# Altium PCB Measurement_board.PcbDoc
Units mil, origin at the board's own origin, x right, y up, seen from the top; angles counter-clockwise.
Board outline 2845 x 3910.04 mil, 2 copper layers (Top Layer, Bottom Layer); 135 components, 113 nets, 406 pads, 74 vias.
Unrouted connection lines stored in the file: 2.
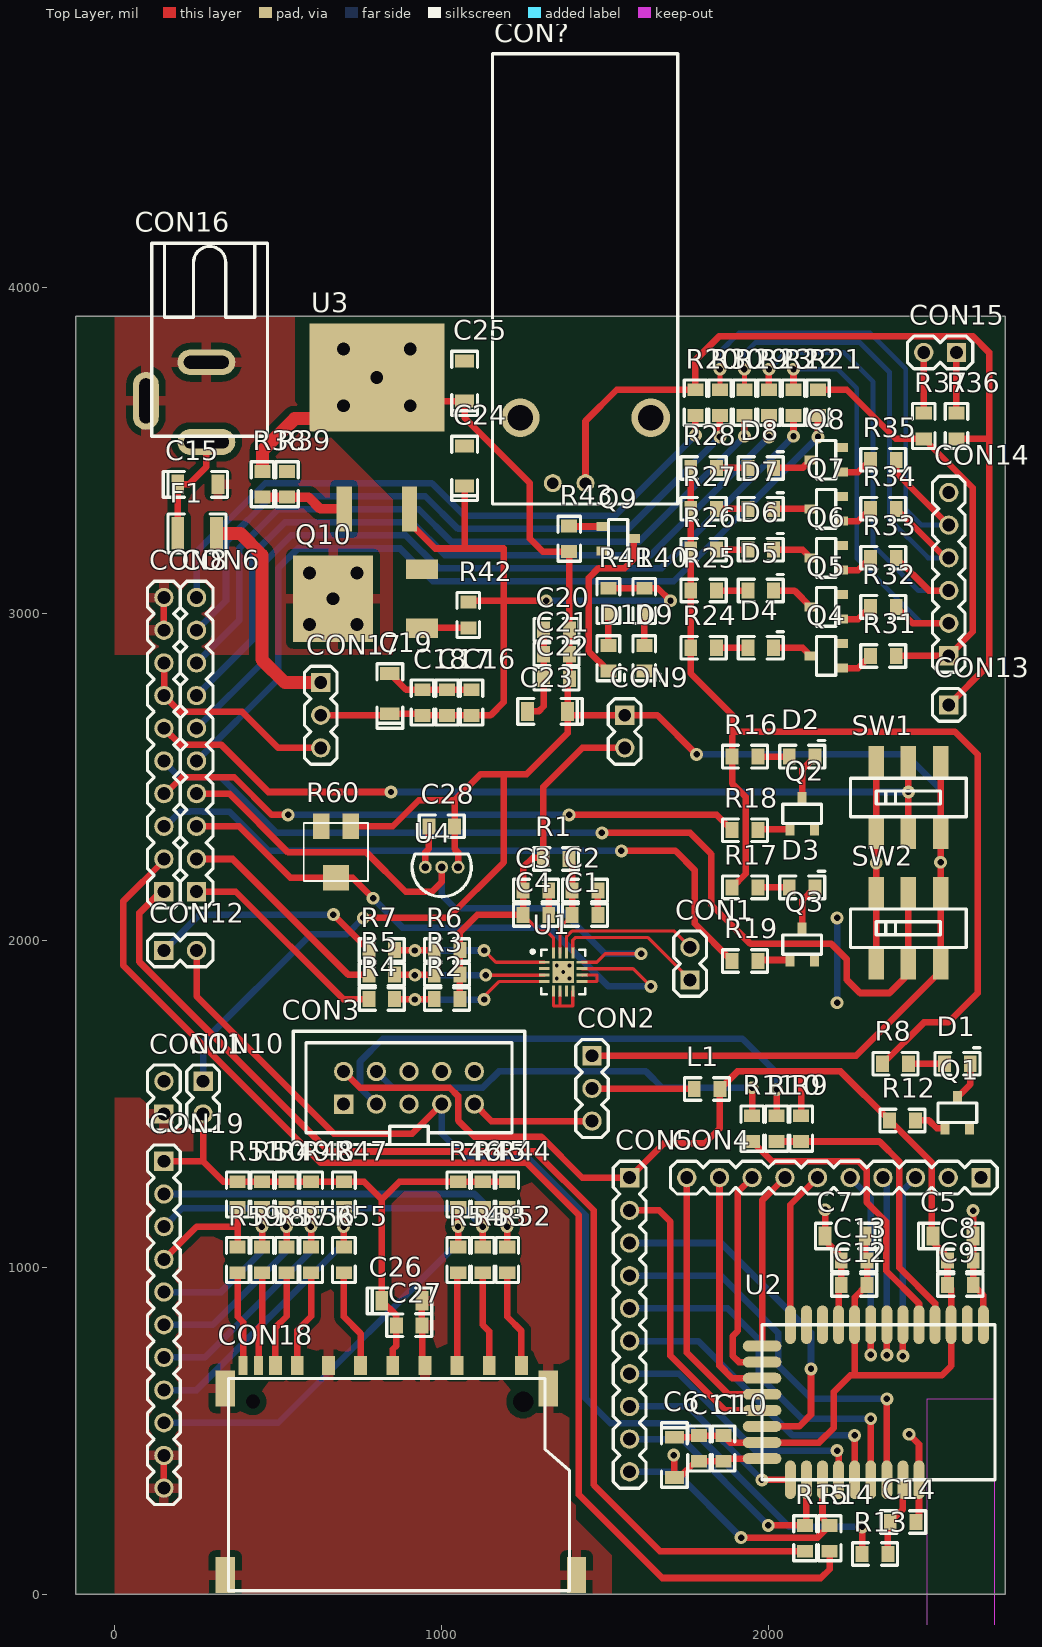
[diagram p0: Top Layer view]
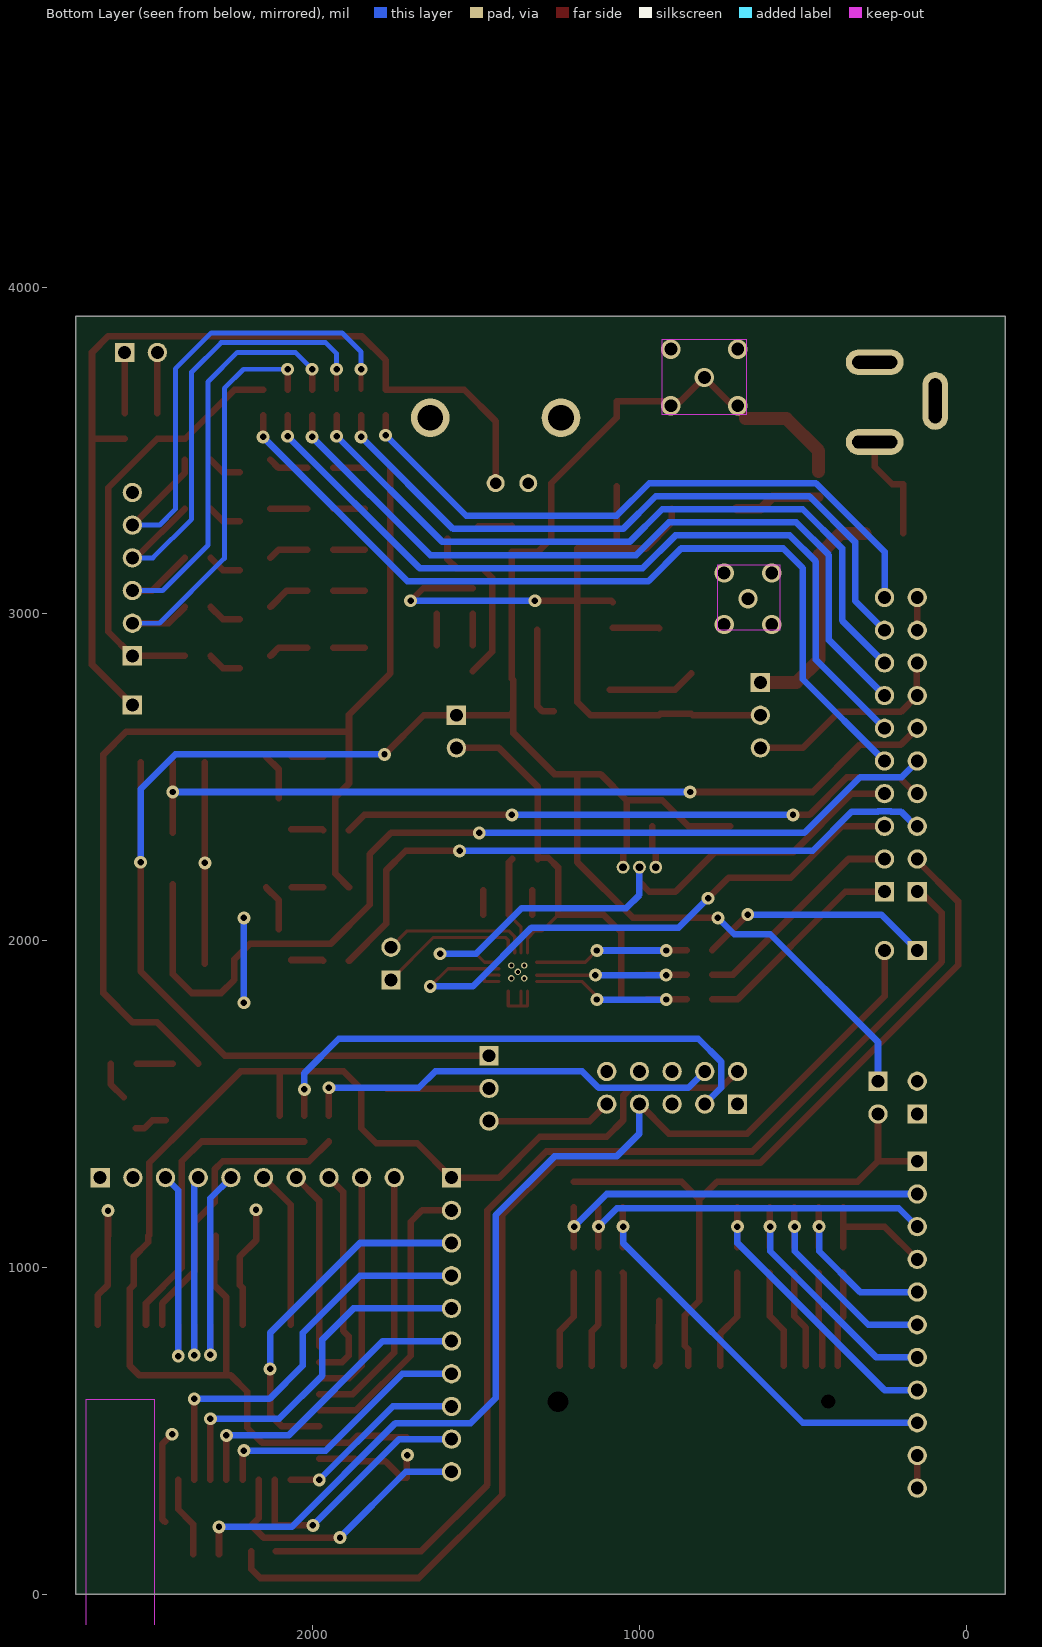
[diagram p1: Bottom Layer view, seen from below]
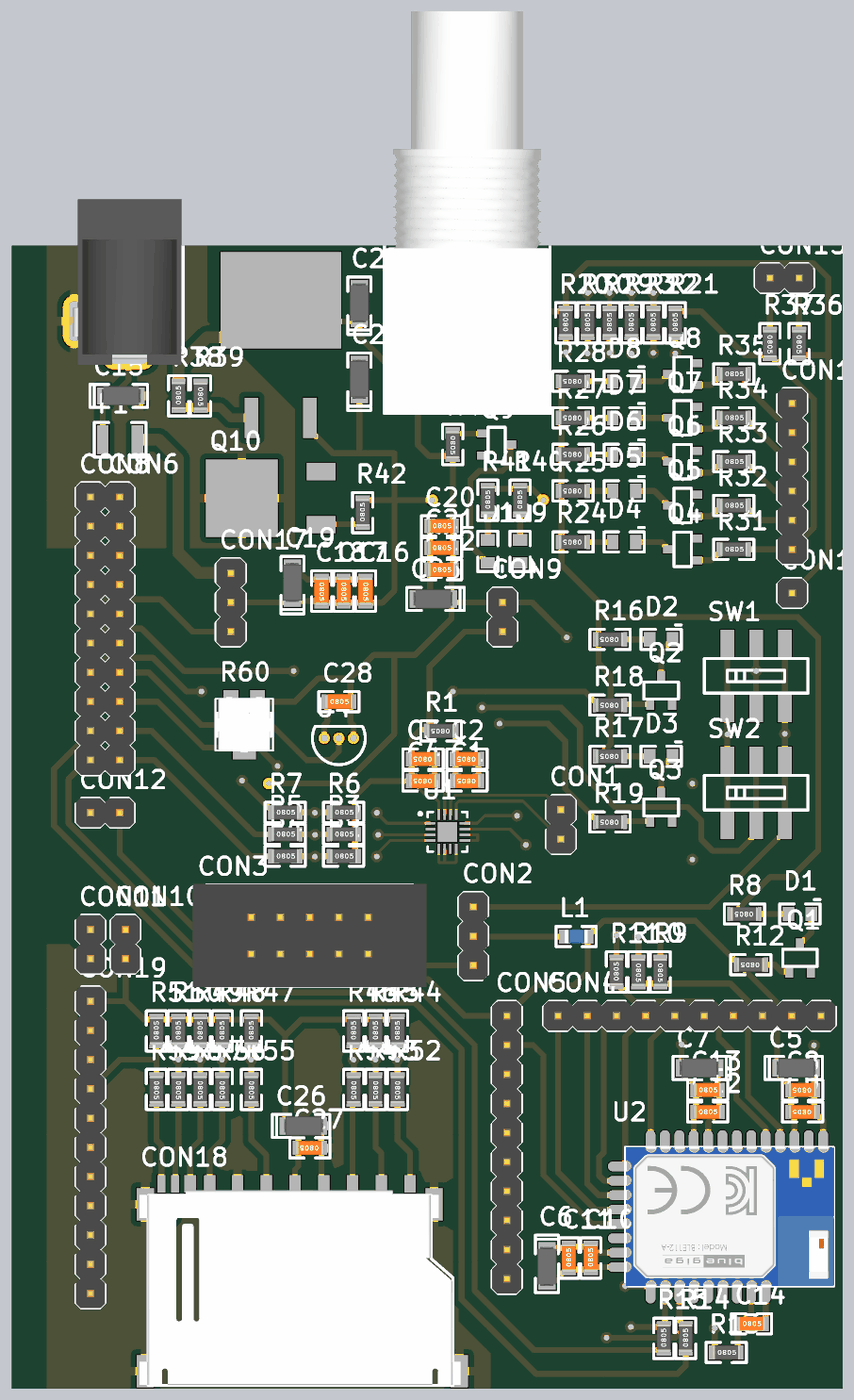
[diagram p2: 3D render of the assembled board from above, using the file's embedded part models]

## Layer stack, top to bottom
Top Solder: solder mask 0.4, Solder Resist, Dk 3.5
Top Layer: signal copper 1.4
Dielectric 1: dielectric 12.6, FR-4, Dk 4.8
Bottom Layer: signal copper 1.4
Bottom Solder: solder mask 0.4, Solder Resist, Dk 3.5

## Board outline
-120,0 2725,0 2725,3910.04 -120,3910.04

## Design rules (kind name [scope] priority, off if disabled: settings)
Clearance [All] p1: gap=10 ignorepadtopadclearanceinfootprint=FALSE except(7: Arc-SMDPad Arc-THPad Arc-Via Arc-Hole Track-SMDPad Track-THPad Track-Via Track-Hole; 20: Arc-Fill Arc-Poly Arc-Region Track-Fill Track-Poly Track-Region SMDPad-Fill SMDPad-Poly SMDPad-Region THPad-Fill THPad-Poly THPad-Region Via-Fill Via-Poly Via-Region; 30: Fill-Fill Fill-Poly Fill-Region Poly-Poly Poly-Region Region-Region)
PlaneConnect [All] p1: planeconnectstyle=Relief reliefexpansion=20 reliefentries=4 reliefconductorwidth=20 reliefairgap=20
PolygonConnect [All] p1: connectstyle=Relief reliefconductorwidth=30 reliefentries=4 polygonreliefangle="90 Angle" airgapwidth=20
RoomDefinition Power [InComponentClass('Power')] p1: confinementstyle=ConfineIn formatcopy=TRUE lockcomponents=FALSE outline 0,3167.11 427.68,3167.11 427.68,2490 1680,2490 1680,4270 0,4270
RoomDefinition BLE112 [InComponentClass('BLE112')] p2: confinementstyle=ConfineIn formatcopy=TRUE lockcomponents=FALSE outline 450,1322.93 1461.01,1322.93 1461.01,-430 2720,-430 2720,1850 450,1850
RoomDefinition Sensors [InComponentClass('Sensors')] p3: confinementstyle=ConfineIn formatcopy=TRUE lockcomponents=FALSE outline 530,2050 1220,2050 1220,2470 530,2470
RoomDefinition SDCard [InComponentClass('SDCard')] p4: confinementstyle=ConfineIn formatcopy=TRUE lockcomponents=FALSE outline 0,0 1520,0 1520,1500 0,1500
RoomDefinition Output [InComponentClass('Output')] p5: confinementstyle=ConfineIn formatcopy=TRUE lockcomponents=FALSE outline 1140,2650 2720,2650 2720,4740 1140,4740
RoomDefinition Measurement_board [InComponentClass('Measurement_board')] p6: confinementstyle=ConfineIn formatcopy=TRUE lockcomponents=FALSE outline 0,1880 520,1880 520,3170 0,3170
RoomDefinition GPIO [InComponentClass('GPIO')] p7: confinementstyle=ConfineIn formatcopy=TRUE lockcomponents=FALSE outline 2720,2700 1700,2700 1700,1800 2720,1800
RoomDefinition ADS7924 [InComponentClass('ADS7924')] p8: confinementstyle=ConfineIn formatcopy=TRUE lockcomponents=FALSE outline 740,1760 1820,1760 1820,2300 740,2300
RoutingVias [All] p1: holewidth=19.68 width=39.37 viastyle="Through Hole" minholewidth=19.68 minwidth=39.37 maxholewidth=19.68 maxwidth=39.37
SolderMaskExpansion [All] p1: expansion=4
Width [All] p1: maxlimit=50 minlimit=6 preferedwidth=10 minimp=50.000000 maximp=50.000000 favimp=50.000000
29 further rules are at their usual default settings.

## Classes and differential pairs
component class Sensors: C28 R60 U4
component class SDCard: C26 C27 CON18 CON19 R44 R45 R46 R47 R48 R49 R50 R51 R52 R53 R54 R55 R56 R57 R58 R59
component class Power: C15 C16 C17 C18 C19 C20 C21 C22 C23 C24 C25 CON16 CON17 D9 D10 F1 Q9 Q10 R38 R39 R40 R41 R42 R43 U3
component class Output: CON13 CON14 CON15 CON? D4 D5 D6 D7 D8 Q4 Q5 Q6 Q7 Q8 R20 R21 R22 R23 R24 R25 R26 R27 R28 R29 R30 R31 R32 R33 R34 R35 R36 R37
component class Measurement_board: CON6 CON8 CON9 CON10 CON11 CON12
component class GPIO: D2 D3 Q2 Q3 R16 R17 R18 R19 SW1 SW2
component class BLE112: C5 C6 C7 C8 C9 C10 C11 C12 C13 C14 CON2 CON3 CON4 CON5 D1 L1 Q1 R8 R9 R10 R11 R12 R13 R14 R15 U2
component class ADS7924: C1 C2 C3 C4 CON1 R1 R2 R3 R4 R5 R6 R7 U1

## Components (designator, comment, footprint, x,y, rotation, side; value= is the part's Value field where it differs from the comment)
C1 "100n" 0805C 1438.39,2078.82 r180 top
C2 "1u" 0805C 1438.39,2153.82 r180 top
C3 "100n" 0805C 1288.39,2153.82 r180 top
C4 "1u" 0805C 1288.39,2078.82 r180 top
C5 "1u/16V" CA 2562.05,1096.46 r0 top
C6 "1u/16V" CA 1712.05,421.46 r270 top
C7 "1u/16V" CA 2237.05,1096.46 r180 top
C8 "100n" 0805C 2587.05,1021.46 r180 top
C9 "100n" 0805C 2587.05,946.46 r180 top
C10 "100n" 0805C 1862.05,446.46 r90 top
C11 "100n" 0805C 1787.05,446.46 r90 top
C12 "100n" 0805C 2262.05,946.46 r0 top
C13 "100n" 0805C 2262.05,1021.46 r0 top
C14 "1n" 0805C 2412.05,221.46 r0 top
C15 "10u/16V" CA 251.42,3396.46 r0 top
C16 "100n" 0805C 1091.46,2728.58 r270 top
C17 "100n" 0805C 1016.46,2728.58 r270 top
C18 "100n" 0805C 941.46,2728.58 r270 top
C19 "1u" CA 841.46,2753.58 r90 top
C20 "100n" 0805C 1351.42,2951.46 r0 top
C21 "100n" 0805C 1351.42,2876.46 r0 top
C22 "100n" 0805C 1351.42,2801.46 r0 top
C23 "1u" CA 1326.42,2701.46 r180 top
C24 "0.1u/16V" CA 1070,3450 r90 top
C25 "1u/16V" CA 1070,3710 r90 top
C26 "10u/16V" CA 875.71,898.23 r0 top
C27 "100n" 0805C 900.71,823.23 r180 top
C28 "0.1u" 0805C 1000,2350 r0 top
CON1 "HDR1X2" HDR1X2RAST 1760,1930 r90 top
CON2 "HDR1X3" HDR1X3RAST 1460,1548.03 r270 top
CON3 "CCDEBUG" HDR2X5_CC 900,1550 r90 top
CON4 "HDR1X10" HDR1X10RAST 2200,1275 r180 top
CON5 "HDR1X10" HDR1X10RAST 1575,825 r270 top
CON6 "HDR1X10" HDR1X10RAST 250,2600 r90 top
CON8 "HDR1X10" HDR1X10RAST 150,2600 r90 top
CON9 "HDR1X2" HDR1X2RAST 1560,2640 r270 top
CON10 "HDR1X2" HDR1X2RAST 270,1520 r270 top
CON11 "HDR1X2" HDR1X2RAST 150,1520 r90 top
CON12 "HDR1X2" HDR1X2RAST 200,1970 r0 top
CON13 "HDR1X1" HDR1X1 2551.42,2721.46 r90 top
CON14 "HDR1X6" HDR1X6RAST 2551.42,3121.46 r90 top
CON15 "HDR1X2" HDR1X2RAST 2525,3800 r180 top
CON16 "DC_Jack" DC_JACK 280,3770 r270 top
CON17 "HDR1X3" HDR1X3RAST 630,2690 r270 top
CON18 "SDCard" SDCard 875,700 r0 top
CON19 "HDR1X11" HDR1X11RAST 150,825 r270 top
CON? "BNC" BNC_THD 1640,3600 r0 top
D1 "LED" 0805LED 2577.95,1623.54 r0 top
D2 "LED" 0805LED 2102.99,2563.19 r0 top
D3 "LED" 0805LED 2102.99,2163.19 r0 top
D4 "LED" 0805LED 1976.42,2896.46 r0 top
D5 "LED" 0805LED 1976.42,3071.46 r0 top
D6 "LED" 0805LED 1976.42,3196.46 r0 top
D7 "LED" 0805LED 1976.42,3321.46 r0 top
D8 "LED" 0805LED 1976.42,3446.46 r0 top
D9 "LED" 0805LED 1620,2864.21 r270 top
D10 "LED" 0805LED 1510,2864.21 r270 top
F1 "Multifuse" 1210FUSE 251.42,3246.46 r0 top
L1 "1uH" 0805L 1812.05,1546.46 r0 top
Q1 "2N7002" SOT23 2577.95,1473.54 r0 top
Q2 "2N7002" SOT23 2102.99,2388.19 r0 top
Q3 "2N7002" SOT23 2102.99,1988.19 r0 top
Q4 "2N7002" SOT23 2176.42,2871.46 r90 top
Q5 "2N7002" SOT23 2176.42,3021.46 r90 top
Q6 "2N7002" SOT23 2176.42,3171.46 r90 top
Q7 "2N7002" SOT23 2176.42,3321.46 r90 top
Q8 "2N7002" SOT23 2176.42,3471.46 r90 top
Q9 "2N7002" SOT23 1540,3230 r270 top
Q10 "IRLR024" TO-252AA 756.42,3046.46 r90 top
R1 "5" 0805R 1350,2250 r180 top
R2 "4k7" 0805R 1016.42,1821.46 r0 top
R3 "4k7" 0805R 1016.42,1896.46 r0 top
R4 "22" 0805R 816.42,1821.46 r0 top
R5 "22" 0805R 816.42,1896.46 r0 top
R6 "4k7" 0805R 1016.42,1971.46 r0 top
R7 "22" 0805R 816.42,1971.46 r0 top
R8 "2k7" 0805R 2388.58,1623.54 r180 top
R9 "10k" 0805R 2100,1425 r270 top
R10 "22" 0805R 2025,1425 r270 top
R11 "22" 0805R 1950,1425 r90 top
R12 "10" 0805R 2410,1450 r180 top
R13 "2k7" 0805R 2325.71,123.23 r0 top
R14 "22" 0805R 2187.05,171.46 r90 top
R15 "22" 0805R 2112.05,171.46 r90 top
R16 "1k8" 0805R 1927.99,2563.19 r180 top
R17 "1k8" 0805R 1927.99,2163.19 r180 top
R18 "10" 0805R 1927.99,2338.19 r180 top
R19 "10" 0805R 1927.99,1938.19 r180 top
R20 "22" 0805R 1776.42,3646.46 r90 top
R21 "22" 0805R 2151.42,3646.46 r90 top
R22 "22" 0805R 2076.42,3646.46 r90 top
R23 "22" 0805R 2001.42,3646.46 r90 top
R24 "3k3" 0805R 1801.42,2896.46 r180 top
R25 "2k7" 0805R 1801.42,3071.46 r180 top
R26 "2k7" 0805R 1801.42,3196.46 r180 top
R27 "2k7" 0805R 1801.42,3321.46 r180 top
R28 "2k7" 0805R 1801.42,3446.46 r180 top
R29 "22" 0805R 1926.42,3646.46 r90 top
R30 "22" 0805R 1851.42,3646.46 r90 top
R31 "10" 0805R 2351.42,2871.46 r0 top
R32 "10" 0805R 2351.42,3021.46 r0 top
R33 "10" 0805R 2351.42,3171.46 r0 top
R34 "10" 0805R 2351.42,3321.46 r0 top
R35 "10" 0805R 2351.42,3471.46 r0 top
R36 "22" 0805R 2575,3575 r270 top
R37 "22" 0805R 2475,3575 r270 top
R38 "270" 0805R 451.42,3396.46 r90 top
R39 "390" 0805R 526.42,3396.46 r270 top
R40 "2k7" 0805R 1620,3039.21 r90 top
R41 "3k3" 0805R 1510,3039.21 r90 top
R42 "10" 0805R 1081.42,2996.46 r90 top
R43 "10" 0805R 1390,3230 r270 top
R44 "47k" 0805R 1200.71,1223.23 r90 top
R45 "47k" 0805R 1125.71,1223.23 r90 top
R46 "47k" 0805R 1050.71,1223.23 r90 top
R47 "47k" 0805R 700.71,1223.23 r90 top
R48 "47k" 0805R 600.71,1223.23 r90 top
R49 "47k" 0805R 525.71,1223.23 r90 top
R50 "47k" 0805R 450.71,1223.23 r90 top
R51 "47k" 0805R 375.71,1223.23 r90 top
R52 "22" 0805R 1200.71,1023.23 r270 top
R53 "22" 0805R 1125.71,1023.23 r270 top
R54 "22" 0805R 1050.71,1023.23 r270 top
R55 "22" 0805R 700.71,1023.23 r270 top
R56 "22" 0805R 600.71,1023.23 r270 top
R57 "22" 0805R 525.71,1023.23 r270 top
R58 "22" 0805R 450.71,1023.23 r270 top
R59 "22" 0805R 375.71,1023.23 r270 top
R60 "10k" TRIM_POT 676.42,2271.46 r0 top
SW1 "DPDT Switch" DPDT 2427.99,2438.19 r180 top
SW2 "DPDT Switch" DPDT 2427.99,2038.19 r180 top
U1 "ADS7924" QFN16 1371.89,1904.53 r0 top
U2 "BLE112" BLE112 2362.05,596.46 r270 top
U3 "LM317" DPAK-3 801.42,3625.12 r0 top
U4 "MCP9700A" TO-92 1000,2225 r180 top

## Footprints (in the part's own frame and the unit in brackets; to place one, negate y for a bottom-side part, rotate by r counter-clockwise, add the part's x,y. Pads: shape width x height; smd on the part's side, far side on the other; paste and mask are expansions set on the pad)
0805C [mm]
  rect 1x1.25 smd: 1(-1,0) 2(1,0)
  silkscreen extent -1.75,-0.88 1.75,0.88, body extent -1.24,-0.62 1.26,0.62, height 0.79
0805L [mm]
  rect 1x1.25 smd: 1(-1,0) 2(1,0)
  silkscreen extent -1.75,-0.88 1.75,0.88, body extent -0.99,-0.59 1.01,0.61, height 0.95
0805LED [mm]
  rect 1x1.25 smd: 1(-1,0) 2(1,0)
  silkscreen extent -1.75,-0.88 1.75,1.25
0805R [mm]
  rect 1x1.25 smd: 1(-1,0) 2(1,0)
  silkscreen extent -1.75,-0.88 1.75,0.88, body extent -1.23,-0.62 1.27,0.62, height 0.79
1210FUSE [mm]
  rect 1x2.5 smd: 1(-1.5,0) 2(1.5,0)
  silkscreen extent -2.25,-1.5 2.25,1.5
BLE112 [mm] "BLE112 Bluetooth Low Energy module"
  oval 3x0.85 smd: AVDD(-5.8,6.25) AVDD(-5.8,5) GND(-5.8,7.5) GND(-5.8,-3.75) GND(6.25,2.5) P0_0(6.25,0) P0_1(6.25,-1.25) P0_2(6.25,-2.5) P0_3(6.25,-3.75) P0_4(6.25,-5) P0_5(6.25,-6.25) P0_6(6.25,-7.5) P1_5(-5.8,-7.5) P1_6(-5.8,-1.25) P1_7(-5.8,0) P2_0(-5.8,1.25) P2_1(-5.8,2.5) P2_2(-5.8,3.75) RESET(6.25,1.25) USB+(-5.8,-5) USB-(-5.8,-6.25) VDD_USB(-5.8,-2.5)
  oval 0.85x3 smd: DVDD(3.35,-9.7) GND(4.6,-9.7) P0_7(2.1,-9.7) P1_0(0.85,-9.7) P1_1(-0.4,-9.7) P1_2(-1.65,-9.7) P1_3(-2.9,-9.7) P1_4(-4.15,-9.7)
  Keep-Out Layer region: 0,3.1 20,3.1 20,8.4 0,8.4
  silkscreen extent -5.8,-9.7 6.25,8.4, body extent -5.82,-9.65 6.23,8.45, height 2.3
BNC_THD [mm]
  round 3 hole 2: 1(-10.16,0) 1(0,0)
  round 1.4 hole 0.9: 1(-7.62,-5.08) 2(-5.08,-5.08)
  silkscreen extent -12.3,-6.7 2.1,28.3, body extent -12.3,-6.65 2.1,28.25, height 15.63
CA [mm] "Capacitor A footprint"
  rect 1x1.5 smd: 1(-1.5,0) 2(1.625,0)
  silkscreen extent -2.62,-1 2.38,1, body extent -1.6,-0.84 1.8,0.84, height 1.7
DC_JACK [mm] "DC Power connector"
  oval 2x4.5 hole 1 slot 3.5 at 90 deg: 1(0,0) 3(6.2,0)
  oval 4.5x2 hole 1 slot 3.5 at 0 deg: 2(3,-4.7)
  silkscreen extent -9.25,-4.25 5.75,4.75, body extent -7.6,-4.8 6.8,4.6, height 11
DPAK-3 [mm]
  rect 1.2x3.504 smd: Vadj(-2.54,-7.713) Vin(2.54,-7.713)
  rect 10.49x8.38 smd: Vout(0,2.5)
DPDT [mm]
  rect 1.2x2.5 smd: 1(-2.5,2.75) 2(0,2.75) 3(2.5,2.75) 4(-2.5,-2.75) 5(0,-2.75) 6(2.5,-2.75)
  silkscreen extent -4.5,-1.5 4.5,1.5
HDR1X1 [mm]
  rect 1.5x1.5 hole 1: 1(0,0)
  silkscreen extent -1.27,-1.27 1.27,1.27, body extent -1.27,-1.27 1.27,1.27, height 8.07
HDR1X2RAST [mm]
  rect 1.5x1.5 hole 1: 1(-1.27,0)
  round 1.5 hole 1: 2(1.27,0)
  silkscreen extent -2.54,-1.27 2.54,1.27, body extent -2.54,-1.27 2.54,1.27, height 8.07
HDR1X3RAST [mm]
  rect 1.5x1.5 hole 1: 1(-2.54,0)
  round 1.5 hole 1: 2(0,0) 3(2.54,0)
  silkscreen extent -3.81,-1.27 3.81,1.27, body extent -3.81,-1.27 3.81,1.27, height 8.07
HDR1X6RAST [mm]
  rect 1.5x1.5 hole 1: 1(-6.35,0)
  round 1.5 hole 1: 2(-3.81,0) 3(-1.27,0) 4(1.27,0) 5(3.81,0) 6(6.35,0)
  silkscreen extent -7.62,-1.27 7.62,1.27, body extent -7.62,-1.27 7.62,1.27, height 8.07
HDR1X10RAST [mm]
  rect 1.5x1.5 hole 1: 1(-11.43,0)
  round 1.5 hole 1: 2(-8.89,0) 3(-6.35,0) 4(-3.81,0) 5(-1.27,0) 6(1.27,0) 7(3.81,0) 8(6.35,0) 9(8.89,0) 10(11.43,0)
  silkscreen extent -12.7,-1.27 12.7,1.27, body extent -12.7,-1.27 12.7,1.27, height 8.07
HDR1X11RAST [mm]
  rect 1.5x1.5 hole 1: 1(-12.7,0)
  round 1.5 hole 1: 2(-10.16,0) 3(-7.62,0) 4(-5.08,0) 5(-2.54,0) 6(0,0) 7(2.54,0) 8(5.08,0) 9(7.62,0) 10(10.16,0) 11(12.7,0)
  silkscreen extent -13.97,-1.27 13.97,1.27, body extent -13.97,-1.27 13.97,1.27, height 8.07
HDR2X5_CC [mm]
  rect 1.5x1.5 hole 1: 1(-1.27,5.08)
  round 1.5 hole 1: 2(1.27,5.08) 3(-1.27,2.54) 4(1.27,2.54) 5(-1.27,0) 6(1.27,0) 7(-1.27,-2.54) 8(1.27,-2.54) 9(-1.27,-5.08) 10(1.27,-5.08)
  silkscreen extent -4.4,-9 4.4,9, body extent -4.47,-10.16 4.48,10.16, height 9
QFN16 [mm]
  rect 0.23x0.85 smd: A0(-0.75,-1.475) ADCIN(0.25,1.475) AGND(0.75,-1.475) AVDD(-0.25,1.475) DGND(-0.25,-1.475) DVDD(-0.75,1.475) MUX_OUT(0.75,1.475) PWRCON(0.25,-1.475)
  rect 1.7x1.7 smd: AGND(0,0)
  rect 0.85x0.23 smd: CH0(1.475,0.75) CH1(1.475,0.25) CH2(1.475,-0.25) CH3(1.475,-0.75) INT(-1.475,0.25) SCLK(-1.475,-0.25) SDA(-1.475,-0.75)
  oval 0.85x0.23 smd: RESET(-1.475,0.75)
  silkscreen extent -2.5,-1.73 1.73,1.73, body extent -1.58,-1.57 1.57,1.58, height 0.8
SDCard [mm]
  round 0 hole 1.1: 16(-11.5,-2.8)
  round 0 hole 1.6: 17(9.5,-2.8)
  rect 0.7x1.5 smd: CD(-11.05,0) WP(-12.25,0)
  rect 1x1.5 smd: CLK(-3.125,0) CMDIO(4.375,0) DAT0(-8.05,0) DAT1(-9.75,0) DAT2(9.375,0) DAT3(6.875,0) GND(-5.625,0) GND(1.875,0) VDD(-0.625,0)
  rect 1.5x2.8 smd: GND(-13.65,-16.275) GND(-13.65,-1.775) GND(11.45,-1.775) GND(13.65,-16.275)
  silkscreen extent -13.4,-17.5 13.1,-1, body extent -14.15,-17.45 13.75,-0.55, height 3.49
SOT23 [mm]
  rect 0.7x1 smd: 1(-0.95,-1.2) 2(0,1.2) 3(0.95,-1.2)
  silkscreen extent -1.5,-0.75 1.5,0.75
TO-92 [mm]
  round 1 hole 0.6: GND(1.27,0) VDD(-1.27,0) Vout(0,0)
  silkscreen extent -2.3,-1.03 2.3,2.3
TO-252AA [mm] "D-PAK or TO-252AA package footprint"
  rect 1.5x2.5 smd: 1(-2.3,-4.65) 3(2.3,-4.65)
  rect 6.74x6.23 smd: 2(0,2.25)
TRIM_POT [mm]
  rect 1.3x2 smd: 0(-1.15,2) 1(1.15,2)
  rect 2x2 smd: 2(0,-2)
  silkscreen extent -2.5,-2.25 2.5,2.25, body extent -2.5,-2.46 2.5,2.46, height 2.6

## Part data
C1 C2 C3 C4 C8 C9 C10 C11 C12 C13 C14 C16 C17 C18 C20 C21 C22 C27 C28: library part CAPACITOR
C5 C6 C7 C15 C19 C23 C24 C25 C26: library part ELECTROLYTIC_CAPACITOR
L1: library part Inductor
R1 R2 R3 R4 R5 R6 R7 R8 R9 R10 R11 R12 R13 R14 R15 R16 R17 R18 R19 R20 R21 R22 R23 R24 R25 R26 R27 R28 R29 R30 R31 R32 R33 R34 R35 R36 R37 R38 R39 R40 R41 R42 R43 R44 R45 R46 R47 R48 R49 R50 R51 R52 R53 R54 R55 R56 R57 R58 R59: library part RESISTOR
R60: library part Trim_pot
SW1 SW2: library part DPDT_Switch

## Via types
v1: diameter 39.37, hole 19.68, Top Layer to Bottom Layer, tented both sides, 56 vias
v2: diameter 59.06, hole 39.37, Top Layer to Bottom Layer, 10 vias
v3: diameter 19.68, hole 11.81, Top Layer to Bottom Layer, 5 vias
v4: diameter 39.37, hole 19.68, Top Layer to Bottom Layer, 3 vias

## Nets (pads, with @x,y where several pads share a name; then routed paths per layer and width w, separated by ;. In a path a pad name is that pad's centre, name@x,y a point inside that pad or via, vN(x,y) a via of type N, cw(c..) or ccw(c..) an arc to the next point about the centre after c; other vN are vias at no path point)
3V: C20.2 C21.2 C22.2 C23.1 C25.1 C28.2 CON2.1 CON9.1 CON10.1 R38.2 R43.2 R60.1 SW1.1 SW1.4 SW2.1 SW2.4 U3.Vout U4.VDD | length 7797.9
  Top Layer w20: U3.Vout@675.04,3597.17 v2(801.42,3723.54) 874.02,3650.94 C25.1 1070,3600 1270,3400 1270,3230 1309.37,3190.63 R43.2 1390,2952.24 C20.2 C21.2 C22.2 1385.47,2796.14 C23.1 ; R60.1 850.2,2350.2 930,2430 1039.37,2430 ; v4(760,2070) 1020,2070 1189.69,2239.69 1189.69,2510 ; U4.VDD 1050,2270.04 1039.37,2280.67 C28.2 1039.37,2430 ; CON2.1 2268.03,1648.03 2526.42,1906.42 SW2.1 SW2.4 v1(2526.42,2240) SW1.1 SW1.4 ; CON9.1@1550,2690 1396.93,2690 C23.1 ; CON9.1 1660,2690 v1(1780,2570) ; 1039.37,2430 1119.37,2510 1189.69,2510 ; 1189.69,2510 1260,2510 1385.47,2635.47 C23.1
  Top Layer w40: R38.2 451.42,3498.58 550,3597.17 U3.Vout@675.04,3597.17
  Bottom Layer w20: CON10.1 270,1690 600,2020 710,2020 v4(760,2070) ; v1(1780,2570) 2420,2570 2526.42,2463.58 v1(2526.42,2240)
  other v2: 699.05,3636.93 903.78,3636.93 699.05,3810.16 903.78,3810.16
5V: C16.2 C17.2 C18.2 C19.1 C24.1 CON17.2 R8.2 R16.2 R17.2 R24.2 R25.2 R26.2 R27.2 R28.2 R40.2 R41.2 R42.2 U3.Vin | length 5693
  Top Layer w20: CON17.2 836.93,2690 C19.1 936.14,2694.53 C18.2 C17.2 C16.2 1149.21,2689.21 1190,2730 1190,3040 ; U3.Vin 901.42,3278.58 980,3200 1070,3200 ; C24.1 1070,3200 ; R42.2 1085.59,3040 1190,3040 ; v4(1320,3040) 1190,3040 ; R41.2 R40.2 1661.42,3078.58 v4(1700,3040) ; R28.2 R27.2 R26.2 R25.2 R24.2 1762.05,2817.95 1888.62,2691.38 1888.62,2640 ; R17.2 1930,2204.57 1930,2440 1888.62,2481.38 R16.2 1888.62,2640 ; R8.2 2475.67,1750 2550,1750 2640,1840 2640,2570 2570,2640 1888.62,2640 ; 1070,3200 1190,3200 1190,3040
  Bottom Layer w20: v4(1320,3040) v4(1700,3040)
5VJACK: CON17.1 F1.2 | length 696.1
  Top Layer w40: F1.2 383.54,3246.46 450,3180 450,2860 520,2790 CON17.1
5VPIN: CON8.7 CON8.8 CON17.3 | length 649.1
  Top Layer w20: CON8.7 CON8.7@151.42,2748.58 ; CON8.8@151.42,2851.42 CON8.7@151.42,2748.58 ; CON17.3 500,2590 390,2700 200,2700 CON8.7@151.42,2748.58
ADS3V: C3.2 C4.2 CON9.2 R1.2 R2.2 R3.2 R6.2 U1.DVDD | length 1304.4
  Top Layer w10: C4.2 1297.83,2030 1320,2030 1342.36,2007.64 U1.DVDD
  Top Layer w20: R2.2 R3.2 R6.2 1055.79,2025.79 1108.82,2078.82 C4.2 C3.2 1249.02,2224.02 1278.82,2253.82 R1.2@1299.02,2253.82 ; R1.2 1310.63,2470.63 1430,2590 CON9.2@1550,2590
ADS7924_RESET: CON12.1 R7.1 | length 717.6
  Top Layer w20: v1(668.5,2080) R7.1
  Bottom Layer w20: CON12.1 260,2080 v1(668.5,2080)
BLE112_RESET: CON3.7 CON12.2 R13.1 | length 3381.5
  Top Layer w20: CON12.2@260,1960 250,1950 250,1830 670,1410 910,1410 CON3.7 ; R13.1 v1(2286.34,206.34)
  Bottom Layer w20: CON3.7 1000,1410 1070,1340 1260,1340 1440,1160 1440,600 1516,524 1746,524 2063.66,206.34 v1(2286.34,206.34)
BLEVDD: C5.1 C6.1 C7.1 C8.2 C9.2 C10.2 C11.2 C12.2 C13.2 CON3.2 CON5.1 L1.2 R9.1 R12.2 U2.AVDD U2.DVDD U2.VDD_USB | length 4545.2
  Top Layer w20: CON3.2 750,1550 1025,1550 1050,1525 1050,1450 1100,1400 1305,1400 1430,1275 CON5.1 1680,1380 1805,1380 1851.42,1426.42 L1.2 1904.96,1600 2100,1600 ; C6.1 1781.73,480.51 C11.2 C10.2 1883.31,464.57 U2.DVDD 2154.57,464.57 2200,510 2200,620 2250,670 2265,670 ; R9.1 2100,1600 ; C7.1 2296.1,1026.77 C13.2 C12.2 2263.62,908.66 U2.VDD_USB 2263.62,671.38 2265,670 ; 2100,1600 2220.63,1600 R12.2 2500,1320.63 2500,1099.45 C5.1 2502.99,1077.01 2547.68,1032.32 C8.2 C9.2 2558.9,935.24 2558.9,824.8 2558.9,698.9 2530,670 2265,670
CCVDD: CON2.3 CON3.9 | length 381.5
  Top Layer w20: CON3.9 1151.97,1448.03 CON2.3
CDPIN: CON19.5 R50.1 R58.1 | length 548
  Top Layer w20: R58.1 R50.1
  Bottom Layer w20: CON19.5 325,925 450,1050 v1(450,1125)
CLKPIN: CON19.8 R47.1 R55.1 | length 907.7
  Top Layer w20: R55.1 R47.1
  Bottom Layer w20: CON19.8 250,625 700,1075 v1(700,1125)
CMDIOPIN: CON19.9 R46.1 R54.1 | length 1299.1
  Top Layer w20: R54.1 R46.1
  Bottom Layer w20: CON19.9 500,525 1050,1075 v1(1050,1125)
DAT0PIN: CON19.7 R48.1 R56.1 | length 780.9
  Top Layer w20: R56.1 R48.1
  Bottom Layer w20: CON19.7 275,725 600,1050 v1(600,1125)
DAT1PIN: CON19.6 R49.1 R57.1 | length 664.5
  Top Layer w20: R57.1 R49.1
  Bottom Layer w20: CON19.6 300,825 525,1050 v1(525,1125)
DAT2PIN: CON19.2 R44.1 R52.1 | length 1212.7
  Top Layer w20: R52.1 R44.1
  Bottom Layer w20: CON19.2 1100,1225 v1(1200,1125)
DAT3PIN: CON19.3 R45.1 R53.1 | length 1142.9
  Top Layer w20: R53.1 R45.1
  Bottom Layer w20: CON19.3 206.25,1181.25 1068.75,1181.25 v1(1125,1125)
GND: C15.2 CON8.9 CON8.10 CON16.1 CON16.2 Q10.2 | length 100
  Top Layer w20: CON8.9 CON8.10
  other v2: 595,2967.72 740.67,2967.72 667.83,3046.46 595,3125.2 740.67,3125.2
GND5: C1.1 C2.1 C3.1 C4.1 C5.2 C6.2 C7.2 C8.1 C9.1 C10.1 C11.1 C12.1 C13.1 C14.2 C16.1 C17.1 C18.1 C19.2 C20.1 C21.1 C22.1 C23.2 C24.2 C25.2 C28.1 CON3.1 CON4.1 CON4.2 CON11.2 CON14.6 CON?.1 D9.2 Q1.3 Q2.3 Q3.3 Q4.3 Q5.3 Q6.3 Q7.3 Q8.3 Q9.3 Q10.3 R39.1 R60.0 SW1.3 SW1.6 SW2.3 SW2.6 U1.A0 U1.AGND U1.CH2 U1.CH3 U1.DGND U2.GND U4.GND | length 3154.2
  Top Layer w10: U1.A0 1342.36,1800 1362.05,1800 ; U1.DGND 1362.05,1800 ; U1.AGND@1401.42,1846.46 1401.42,1800 1362.05,1800 ; U1.CH3 1475,1875 1475,1895 1430.27,1895 U1.CH2
  Top Layer w20: C19.2 891.06,2767.95 C18.1 C17.1 C16.1 ; U4.GND 950,2270.04 960.63,2280.67 C28.1 ; C23.2 1296.46,2701.46 1312.05,2717.05 C22.1 C21.1 C20.1 ; C4.1 C3.1 ; C1.1 C2.1 ; v1(1710,425.91) 1712.05,427.95 C6.2 1727.48,357.48 1777.09,407.09 C11.1 C10.1 1870.31,415.35 U2.GND@1980.16,415.35 ; v1(2173.07,1176.93) C7.2 2173.07,1083.07 2222.68,1033.46 C13.1 C12.1 2214.41,938.19 U2.GND@2214.41,824.8 ; SW2.3 SW2.6 v1(2329.57,2238.19) SW1.3 SW1.6 ; v1(2430,490) 2460.47,459.53 2460.47,350.39 2460.47,230.51 C14.2 ; v1(2626.02,1173.98) C5.2 2626.42,1096.06 C8.1 C9.1 2657.32,915.55 U2.GND@2657.32,824.8
  other v3: 1352.2,1884.84 1391.57,1884.84 1371.89,1904.53 1352.2,1924.21 1391.57,1924.21
ID0: CON6.6 R22.1 | length 2518.6
  Top Layer w20: v1(2076.42,3543.58) R22.1
  Bottom Layer w20: CON6.6 460,2860 460,3160 540,3240 890,3240 990,3140 1672.83,3140 v1(2076.42,3543.58)
ID0PIN: CON14.2 R22.2 R32.2 | length 1345.6
  Top Layer w20: R22.2 v1(2076.42,3748.58) ; R32.2 2440.79,2971.46 CON14.2
  Bottom Layer w15: v1(2076.42,3748.58) 2211.42,3748.58 2270,3690 2270,3170 2468.54,2971.46 CON14.2
ID1: CON6.7 R23.1 | length 2380.1
  Top Layer w20: v1(2001.42,3541.42) R23.1
  Bottom Layer w20: CON6.7 420,2920 420,3180 520,3280 910,3280 1010,3180 1640,3180 v1(2001.42,3541.42)
ID1PIN: CON14.3 R23.2 R33.2 | length 1430.8
  Top Layer w20: R23.2 v1(2001.42,3748.58) ; R33.2 2490.79,3071.46 CON14.3
  Bottom Layer w15: v1(2001.42,3748.58) 2052.83,3800 2230,3800 2320,3710 2320,3210 2458.54,3071.46 CON14.3
ID2: CON6.8 R29.1 | length 2238.9
  Top Layer w20: v1(1926.42,3543.58) R29.1
  Bottom Layer w20: CON6.8 380,2980 380,3200 500,3320 930,3320 1030,3220 1602.83,3220 v1(1926.42,3543.58)
ID2PIN: CON14.4 R29.2 R34.2 | length 1508.6
  Top Layer w15: R29.2 v1(1926.42,3748.58)
  Top Layer w20: R34.2 2540.79,3171.46 CON14.4
  Bottom Layer w15: v1(1926.42,3748.58) 1926.42,3796.42 1960,3830 2280,3830 2370,3740 2370,3290 2488.54,3171.46 CON14.4
ID3: CON6.9 R30.1 | length 2100.3
  Top Layer w20: v1(1851.42,3541.42) R30.1
  Bottom Layer w20: CON6.9 340,3040 340,3220 480,3360 950,3360 1050,3260 1570,3260 v1(1851.42,3541.42)
ID3PIN: CON14.5 R30.2 R35.2 | length 1602.1
  Top Layer w15: R30.2 v1(1851.42,3748.58)
  Top Layer w20: R35.2 2390.79,3432.09 CON14.5
  Bottom Layer w15: v1(1851.42,3748.58) 1851.42,3801.42 1910,3860 2310,3860 2420,3750 2420,3320 2468.54,3271.46 CON14.5
Input: CON6.10 R20.1 | length 1957.6
  Top Layer w20: v1(1776.42,3546.42) R20.1
  Bottom Layer w20: CON6.10 250,3190 460,3400 970,3400 1070,3300 1530,3300 v1(1776.42,3546.42)
InputPIN: CON13.1 CON?.2 R20.2 R36.2 | length 2831.8
  Top Layer w20: CON?.2 1440,3590 1535.83,3685.83 R20.2 1776.42,3776.42 1850,3850 2625,3850 2675,3800 2675,2845.04 CON13.1 ; R36.2 2670.63,3535.63
LED0: CON8.4 R18.2 | length 1826.4
  Top Layer w20: CON8.4@151.42,2446.46 204.96,2500 365,2500 480,2385 v1(530,2385) ; v1(1390,2385) 1841.81,2385 R18.2
  Bottom Layer w20: v1(530,2385) v1(1390,2385)
LED1: CON8.3 R19.2 | length 2043.4
  Top Layer w20: v1(1550,2275) 1715,2275 1775,2215 1775,2051.81 R19.2
  Bottom Layer w20: CON8.3@151.42,2346.46 199.96,2395 229.2,2395 230.73,2396.53 269.27,2396.53 270.8,2395 350,2395 470,2275 v1(1550,2275)
MCP9700A_signal: CON6.4 U1.CH0 U4.Vout | length 1892
  Top Layer w10: U1.CH0 1474.06,1934.06 1500,1960 v1(1610,1960)
  Top Layer w20: CON6.4 350,2450 530,2270 770,2270 890,2150 970,2150 1000,2180 U4.Vout
  Bottom Layer w20: U4.Vout 1000,2140 1040,2100 1360,2100 1500,1960 v1(1610,1960)
NetC1_2: C1.2 C2.2 R1.1 U1.AVDD | length 306.7
  Top Layer w10: U1.AVDD 1362.05,2041.85 C1.2
  Top Layer w20: R1.1 1399.02,2240.35 C2.2 C1.2
NetC14_1: C14.1 R13.2 U2.RESET | length 246.3
  Top Layer w20: R13.2 2365.08,213.86 C14.1 2411.26,260.04 U2.RESET
NetC15_1: C15.1 CON16.3 F1.1 | length 335.7
  Top Layer w20: F1.1 C15.1 226.46,3396.46 280,3450 CON16.3
NetCON1_1: CON1.1 U1.MUX_OUT | length 454.8
  Top Layer w10: U1.MUX_OUT 1401.42,2001.42 1410,2010 1630,2010 CON1.1
NetCON1_2: CON1.2 U1.ADCIN | length 455.8
  Top Layer w10: U1.ADCIN 1381.73,1971.56 1381.89,1971.72 1381.89,1993.83 1381.73,1993.99 1381.73,2011.73 1400,2030 1710,2030 CON1.2
NetCON3_3: CON3.3 R10.1 | length 1628.8
  Top Layer w20: R10.1 v1(2025,1545)
  Bottom Layer w20: CON3.3 750,1550 750,1630 820,1700 1920,1700 2025,1595 v1(2025,1545)
NetCON3_4: CON3.4 R11.2 | length 1297.8
  Top Layer w20: R11.2 v1(1950,1550)
  Bottom Layer w20: CON3.4 850,1550 1125,1550 1175,1600 1625,1600 1675,1550 v1(1950,1550)
NetCON15_1: CON15.1 R36.1 | length 185.6
  Top Layer w20: R36.1 CON15.1
NetCON15_2: CON15.2 R37.1 | length 185.6
  Top Layer w20: R37.1 CON15.2
NetCON18_CD: CON18.CD R58.2 | length 288.3
  Top Layer w20: CON18.CD 439.96,814.96 450.71,825.71 R58.2
NetCON18_CLK: CON18.CLK R55.2 | length 305.1
  Top Layer w20: R55.2 700.71,849.29 751.97,798.03 CON18.CLK
NetCON18_CMDIO: CON18.CMDIO R54.2 | length 285.3
  Top Layer w20: CON18.CMDIO 1047.24,980.39 R54.2
NetCON18_DAT0: CON18.DAT0 R56.2 | length 301.5
  Top Layer w20: CON18.DAT0 558.07,808.07 600.71,850.71 R56.2
NetCON18_DAT1: CON18.DAT1 R57.2 | length 298.2
  Top Layer w20: CON18.DAT1 491.14,816.14 525.71,850.71 R57.2
NetCON18_DAT2: CON18.DAT2 R52.2 | length 301.8
  Top Layer w20: R52.2 1200.71,849.29 1244.09,805.91 CON18.DAT2
NetCON18_DAT3: CON18.DAT3 R53.2 | length 292.1
  Top Layer w20: R53.2 1125.71,824.29 1145.67,804.33 CON18.DAT3
NetCON18_WP: CON18.WP R59.2 | length 290.9
  Top Layer w20: R59.2 375.71,849.29 392.72,832.28 CON18.WP
NetD1_1: D1.1 R8.1 | length 110.6
  Top Layer w20: R8.1 D1.1
NetD1_2: D1.2 Q1.2 | length 119.1
  Top Layer w20: Q1.2 2617.32,1560.16 D1.2
NetD2_1: D2.1 R16.1 | length 96.3
  Top Layer w20: R16.1 D2.1
NetD2_2: D2.2 Q2.2 | length 144.1
  Top Layer w20: Q2.2 2102.99,2523.82 D2.2
NetD3_1: D3.1 R17.1 | length 96.3
  Top Layer w20: R17.1 D3.1
NetD3_2: D3.2 Q3.2 | length 144.1
  Top Layer w20: Q3.2 2102.99,2123.82 D3.2
NetD4_1: D4.1 R24.1 | length 96.3
  Top Layer w20: R24.1 D4.1
NetD4_2: D4.2 Q4.2 | length 123.7
  Top Layer w20: D4.2 2104.17,2896.46 Q4.2
NetD5_1: D5.1 R25.1 | length 96.3
  Top Layer w20: R25.1 D5.1
NetD5_2: D5.2 Q5.2 | length 134.1
  Top Layer w20: D5.2 2079.17,3071.46 Q5.2
NetD6_1: D6.1 R26.1 | length 96.3
  Top Layer w20: R26.1 D6.1
NetD6_2: D6.2 Q6.2 | length 123.7
  Top Layer w20: D6.2 2104.17,3196.46 Q6.2
NetD7_1: D7.1 R27.1 | length 96.3
  Top Layer w20: R27.1 D7.1
NetD7_2: D7.2 Q7.2 | length 113.4
  Top Layer w20: D7.2 Q7.2
NetD8_1: D8.1 R28.1 | length 96.3
  Top Layer w20: R28.1 D8.1
NetD8_2: D8.2 Q8.2 | length 123.7
  Top Layer w20: D8.2 2104.17,3446.46 Q8.2
NetD9_1: D9.1 R40.1 | length 96.3
  Top Layer w20: D9.1 R40.1
NetD10_1: D10.1 R41.1 | length 96.3
  Top Layer w20: D10.1 R41.1
NetD10_2: D10.2 Q9.2 | length 533.7
  Top Layer w20: D10.2 1450,2884.84 1450,3110 1480,3140 1560,3140 1587.24,3167.24 Q9.2
NetQ1_1: Q1.1 R12.1 | length 101
  Top Layer w20: R12.1 2490.87,1450 2514.57,1426.3 Q1.1
NetQ2_1: Q2.1 R18.1 | length 99.4
  Top Layer w20: R18.1 1970.12,2340.95 Q2.1
NetQ3_1: Q3.1 R19.1 | length 99.4
  Top Layer w20: R19.1 1970.12,1940.95 Q3.1
NetQ4_1: Q4.1 R31.1 | length 103.9
  Top Layer w20: Q4.1 2274.65,2834.06 R31.1
NetQ5_1: Q5.1 R32.1 | length 103.9
  Top Layer w20: Q5.1 2274.65,2984.06 R32.1
NetQ6_1: Q6.1 R33.1 | length 103.9
  Top Layer w20: Q6.1 2274.65,3134.06 R33.1
NetQ7_1: Q7.1 R34.1 | length 103.9
  Top Layer w20: Q7.1 2274.65,3284.06 R34.1
NetQ8_1: Q8.1 R35.1 | length 103.9
  Top Layer w20: Q8.1 2274.65,3434.06 R35.1
NetQ9_1: Q9.1 R43.1 | length 103.6
  Top Layer w20: R43.1 1391.97,3267.4 Q9.1
NetQ10_1: Q10.1 R42.1 | length 142.4
  Top Layer w20: Q10.1 940.67,2957.09 R42.1
NetR2_1: R2.1 R4.2 U1.SDA | length 547.9
  Top Layer w10: v1(1130,1820) 1130,1830 1175,1875 U1.SDA
  Top Layer w20: R4.2 v1@916.42,1821.46 ; v1(917.87,1820) v1@916.42,1821.46 ; R2.1 v1@916.42,1821.46
  Bottom Layer w20: v1(917.87,1820) v1(1130,1820)
NetR3_1: R3.1 R5.2 U1.SCLK | length 519.4
  Top Layer w10: v1(1134.69,1894.69) U1.SCLK
  Top Layer w20: R5.2 v1@916.42,1896.46 ; v1(918.19,1894.69) v1@916.42,1896.46 ; R3.1 v1@916.42,1896.46
  Bottom Layer w20: v1(918.19,1894.69) v1(1134.69,1894.69)
NetR6_1: R6.1 R7.2 U1.RESET | length 534.2
  Top Layer w10: v1(1130,1970) 1165.94,1934.06 U1.RESET
  Top Layer w20: R7.2 v1@916.42,1971.46 ; v1(917.87,1970) v1@916.42,1971.46 ; R6.1 v1@916.42,1971.46
  Bottom Layer w20: v1(917.87,1970) v1(1130,1970)
NetR38_1: R38.1 R39.2 U3.Vadj | length 264.8
  Top Layer w30: R38.1 R39.2 592.91,3357.09 628.54,3321.46 U3.Vadj
Output: CON6.5 R21.1 | length 2659.8
  Top Layer w20: v1(2151.42,3541.42) R21.1
  Bottom Layer w20: CON6.5 500,2800 500,3140 560,3200 872.5,3200 972.5,3100 1710,3100 v1(2151.42,3541.42)
OutputPIN: CON14.1 R21.2 R31.2 R37.2 | length 1303.2
  Top Layer w20: R21.2 2239.17,3685.83 2389.37,3535.63 R37.2 2625,3385.63 2625,2945.04 CON14.1 R31.2
P0_0: CON5.4 U2.P0_0 | length 1249.4
  Top Layer w20: U2.P0_0 v1(2362.05,597.95)
  Bottom Layer w20: CON5.4 1855,975 2030,800 2030,700 2132.05,597.95 v1(2362.05,597.95)
P0_1: CON5.5 U2.P0_1 | length 1129
  Top Layer w20: U2.P0_1 v1(2312.83,537.17)
  Bottom Layer w20: CON5.5 1875,875 1970,780 1970,670 2102.83,537.17 v1(2312.83,537.17)
P0_2: CON5.6 U2.P0_2 | length 944.2
  Top Layer w20: U2.P0_2 v1(2263.62,486.38)
  Bottom Layer w20: CON5.6 1785,775 2073.62,486.38 v1(2263.62,486.38)
P0_3: CON5.7 U2.P0_3 | length 835
  Top Layer w20: v1(2210,440) 2210,441.18 2214.41,445.59 U2.P0_3
  Bottom Layer w20: CON5.7 1725,675 1960,440 v1(2210,440)
P0_4: CON5.10 R14.2 U2.P0_4 | length 859.4
  Top Layer w20: v1(1916.22,173.78) 2150,173.78 R14.2 2165.2,232.68 U2.P0_4
  Bottom Layer w20: CON5.10 1715,375 v1(1916.22,173.78)
P0_5: CON5.9 R15.2 U2.P0_5 | length 787.7
  Top Layer w20: v1(1999.17,210.83) R15.2 2115.98,214.76 U2.P0_5
  Bottom Layer w20: CON5.9 1735,475 v1(1999.17,210.83)
P0_6: CON5.8 U2.P0_6 | length 584.8
  Top Layer w20: v1(1979.61,350.39) U2.P0_6
  Bottom Layer w20: CON5.8 1755,575 v1(1979.61,350.39)
P0_7: CON5.3 U2.P0_7 | length 1083.8
  Top Layer w20: U2.P0_7 2093.78,513.78 2130,550 v1(2130,690)
  Bottom Layer w20: CON5.3 1855,1075 2130,800 v1(2130,690)
P1_0: CON5.2 U2.P1_0 | length 898.8
  Top Layer w20: CON5.2 1665,1175 1700,1140 1700,730 1867.01,562.99 U2.P1_0
P1_1: CON4.10 U2.P1_1 | length 818.1
  Top Layer w20: CON4.10 1750,740 1877.79,612.21 U2.P1_1
P1_2: CON4.9 U2.P1_2 | length 721.1
  Top Layer w20: CON4.9 1850,700 1888.58,661.42 U2.P1_2
P1_3: CON4.8 U2.P1_3 | length 668
  Top Layer w20: CON4.8 1906.1,1231.1 1906.1,806.1 1890,790 1890,730 1909.37,710.63 U2.P1_3
P1_4: CON4.7 U2.P1_4 | length 544.1
  Top Layer w20: U2.P1_4 1980.16,1205.16 CON4.7
P1_5: CON4.6 U2.P1_5 | length 484.7
  Top Layer w20: U2.P1_5 2066.77,1191.77 CON4.6
P1_6: CON4.5 U2.P1_6 | length 660.2
  Top Layer w20: v1(2312.83,732.83) U2.P1_6
  Bottom Layer w20: CON4.5 2312.83,1212.17 v1(2312.83,732.83)
P1_7: CON4.4 U2.P1_7 | length 640.7
  Top Layer w20: v1(2362.05,732.05) U2.P1_7
  Bottom Layer w20: CON4.4 2362.05,1262.95 v1(2362.05,732.05)
P2_0: CON4.3 U2.P2_0 | length 658.4
  Top Layer w20: v1(2411.26,728.74) U2.P2_0
  Bottom Layer w20: v1(2411.26,728.74) 2411.26,1236.26 CON4.3
P2_1: R11.1 U2.P2_1 | length 927.1
  Top Layer w20: R11.1 2010.63,1325 2275,1325 2300,1300 2300,1200 2360,1140 2360,990 2460.47,889.53 U2.P2_1
P2_2: R9.2 R10.2 U2.P2_2 | length 945.7
  Top Layer w20: R10.2 R9.2 2339.37,1385.63 2400,1325 2400,1000 2509.68,890.32 U2.P2_2
Potmeter_signal: CON6.3 R60.2 U1.CH1 | length 1825.5
  Top Layer w10: U1.CH1 1585.63,1914.37 v1(1640,1860)
  Top Layer w20: CON6.3 380,2350 537.28,2192.72 R60.2 727.28,2192.72 v1(790,2130)
  Bottom Layer w20: v1(790,2130) 880,2040 1330,2040 1510,1860 v1(1640,1860)
SCLPIN: CON6.2 R5.1 | length 673.5
  Top Layer w20: CON6.2 360,2250 713.54,1896.46 R5.1
SDAPIN: CON6.1 R4.1 | length 663.1
  Top Layer w20: CON6.1 370,2150 698.54,1821.46 R4.1
SDGND: C26.2 C27.1 CON11.1 CON18.GND CON19.10 CON19.11 | length 302
  Top Layer w20: CON19.11 CON19.10 ; C26.2 939.69,823.62 C27.1 940.08,708.74 CON18.GND@948.82,700
SDVDD: C26.1 C27.2 CON10.2 CON18.VDD CON19.1 R44.2 R45.2 R46.2 R47.2 R48.2 R49.2 R50.2 R51.2 | length 1797.9
  Top Layer w20: CON19.1 270,1325 ; CON10.2 270,1325 ; CON18.VDD 850.39,749.61 861.34,760.55 C27.2 861.34,853.54 C26.1 816.65,1208.35 ; R44.2 R45.2 R46.2 870.91,1262.6 816.65,1208.35 ; 270,1325 332.4,1262.6 R51.2 R50.2 R49.2 R48.2 R47.2 762.4,1262.6 816.65,1208.35
SW0: CON8.6 SW1.2 SW1.5 | length 2572.4
  Top Layer w20: CON8.6@151.42,2646.46 153.54,2646.46 200,2600 325,2600 470,2455 v1(845,2455) ; SW1.2 v1(2427.99,2455) SW1.5
  Bottom Layer w20: v1(845,2455) v1(2427.99,2455)
SW1: CON8.5 SW2.2 SW2.5 | length 2994.6
  Top Layer w20: v1(1490,2330) 1760,2330 1825,2265 1825,2110 1945,1990 2192.5,1990 2240,1942.5 2240,1880 2280,1840 2370,1840 2427.99,1897.99 SW2.2 SW2.5 SW2.5@2427.99,2172.01
  Bottom Layer w20: CON8.5@151.42,2546.46 197.87,2500 325,2500 495,2330 v1(1490,2330)
UART_RX: CON8.1 R15.1 | length 3527.8
  Top Layer w20: CON8.1 140,2150 75,2085 75,1935 655,1355 1285,1355 1465,1175 1465,335 1667.91,132.09 R15.1
UART_TX: CON8.2 R14.1 | length 3879.6
  Top Layer w20: CON8.2@151.42,2246.46 25,2120.04 25,1925 630,1320 1260,1320 1420,1160 1420,305 1675,50 2160,50 2187.05,77.05 R14.1
VDD_UNFILT: CON2.2 L1.1 | length 312.7
  Top Layer w20: CON2.2@1460,1546.46 L1.1
WPPIN: CON19.4 R51.1 R59.1 | length 388.4
  Top Layer w20: CON19.4 250,1125 375.71,1125 ; R59.1 375.71,1125 ; R51.1 375.71,1125
pads on no net: CON3.5 CON3.6 CON3.8 CON3.10 CON18.16 CON18.17 U1.INT U1.PWRCON U2.USB+ U2.USB-
copper on no net: | length 260
  Bottom Layer w20: v1(2210,1810) v1(2210,2070)

## Polygon pours and split planes (outlines as drawn)
GND on Top Layer "Top Layer-GND" (solid, pour order 2): 0,3910 0,2875 850,2875 850,3350 550,3650 550,3910
SDGND on Top Layer "Top Layer-SDGND" (solid, remove dead copper, pour order 0): 0,0 0,1520 350,1520 560,1310 1240,1310 1410,1140 1410,230 1520,120 1520,0

## Keep-outs
Bottom Layer:
  rectangle net GND: 570,2950 760,3150
  rectangle net 3V: 673.32,3610 930,3840